# Altium PCB PCB.PcbDoc (part 1 of 3)
Units mm, origin at the board's own origin, x right, y up, seen from the top; angles counter-clockwise.
Board outline 140.5 x 50 mm, 2 copper layers (Top Layer, Bottom Layer), stack 1.69 mm thick; 217 components, 154 nets, 1179 pads, 592 vias.
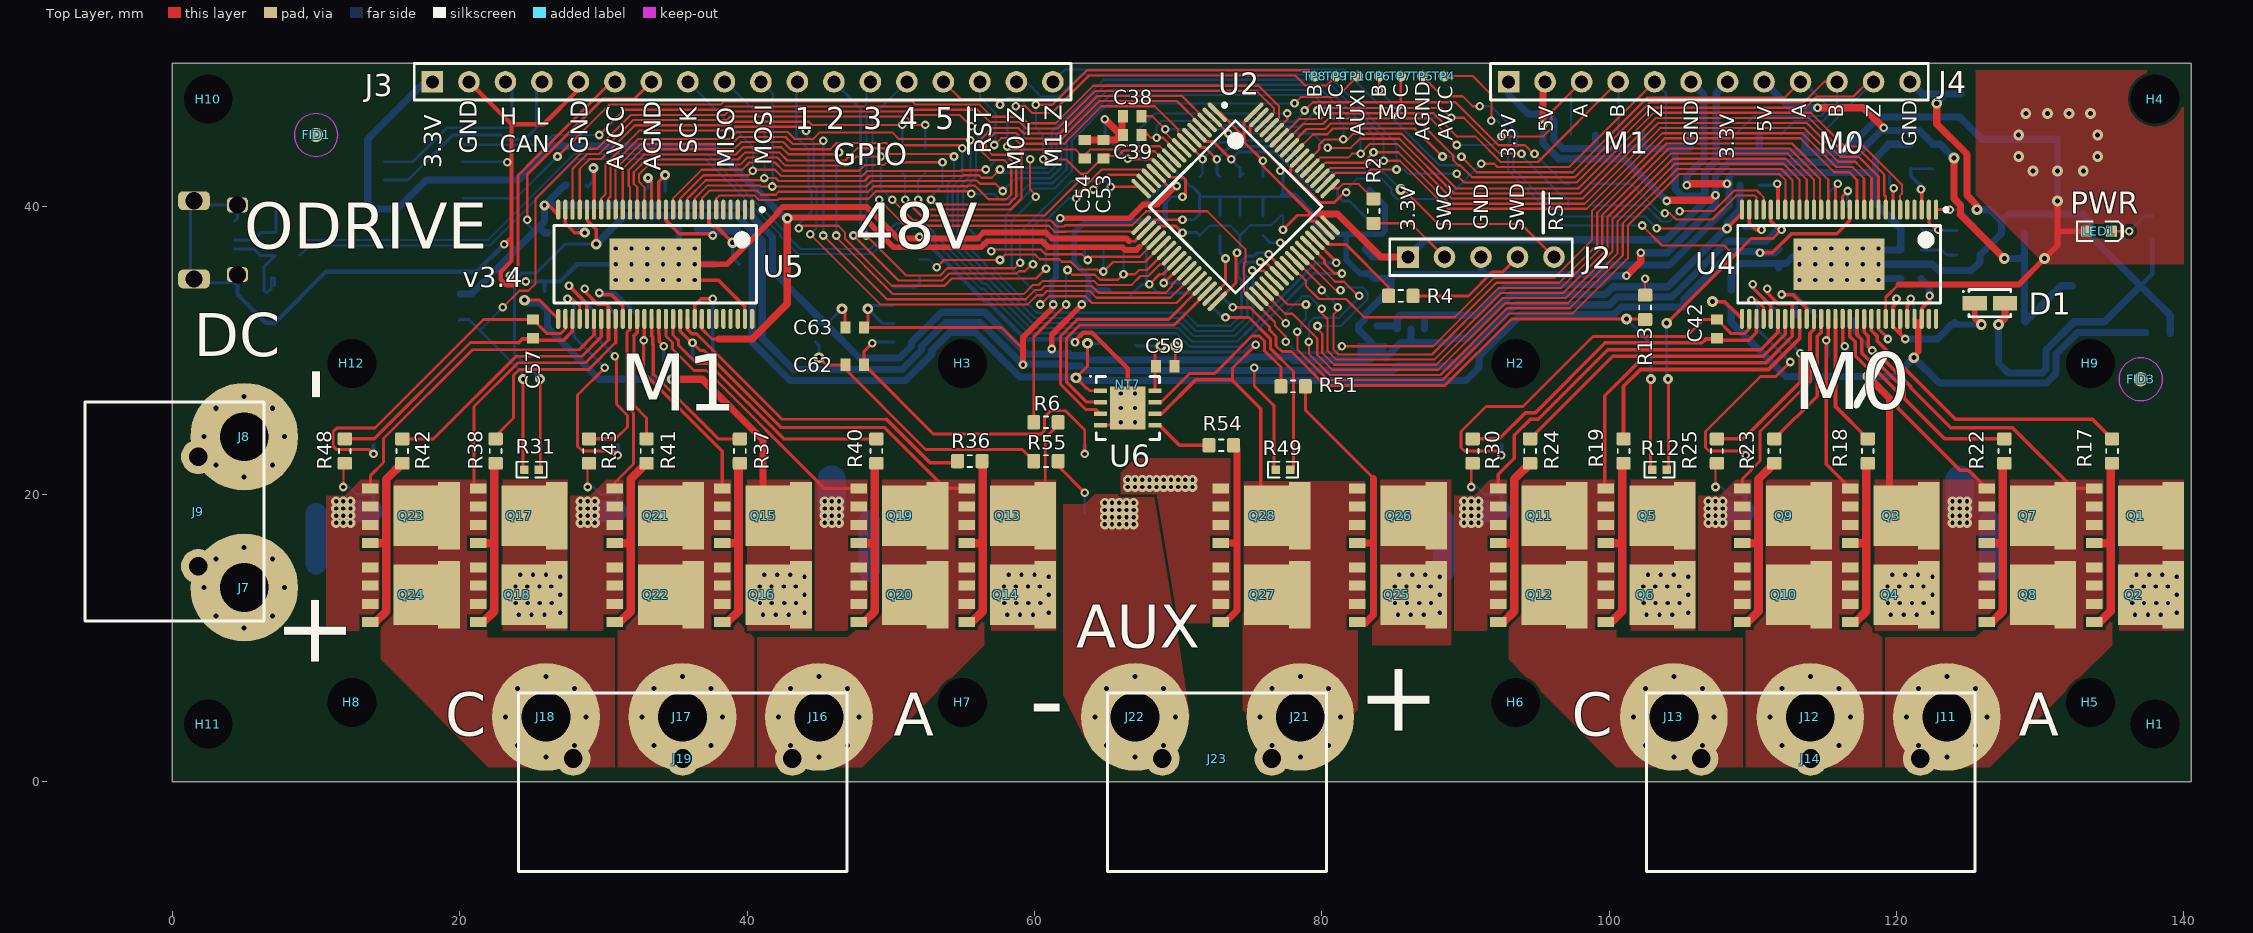
[diagram p0: Top Layer view]
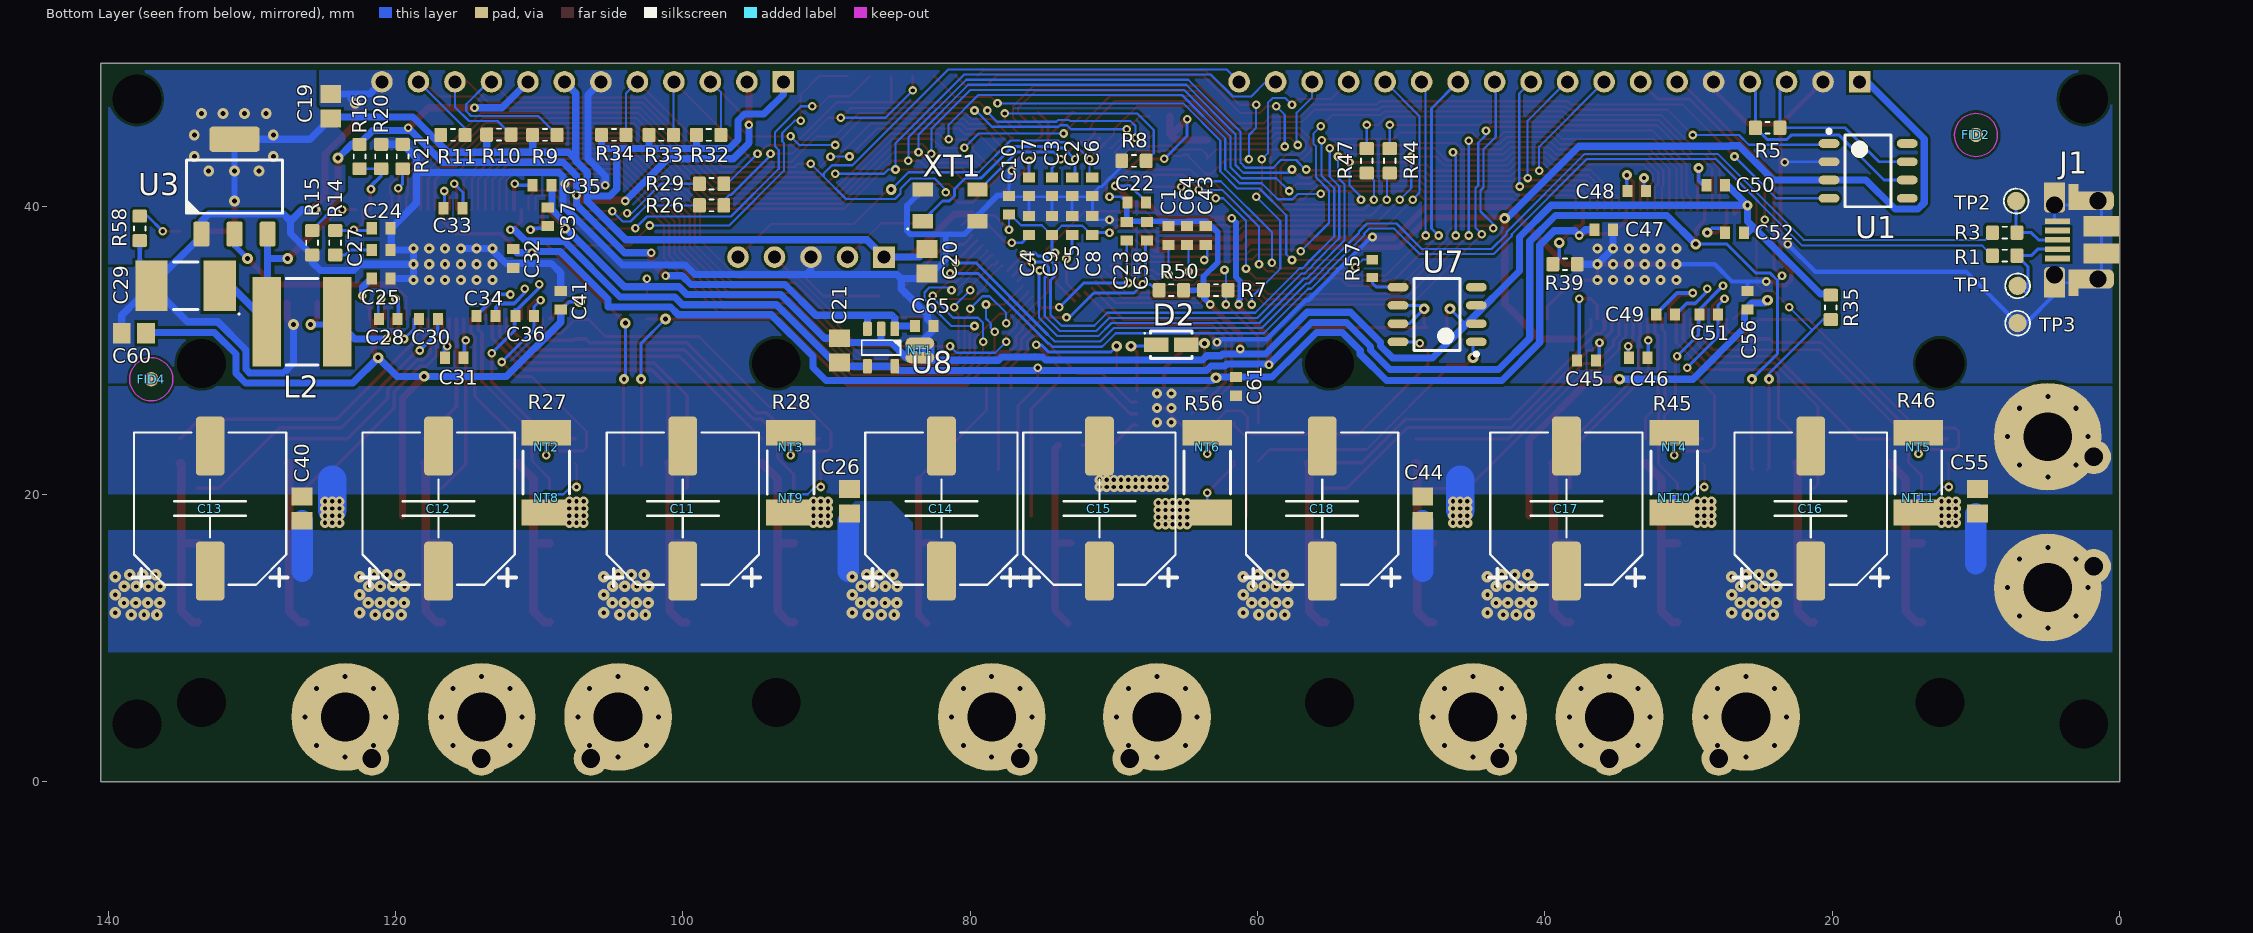
[diagram p1: Bottom Layer view, seen from below]
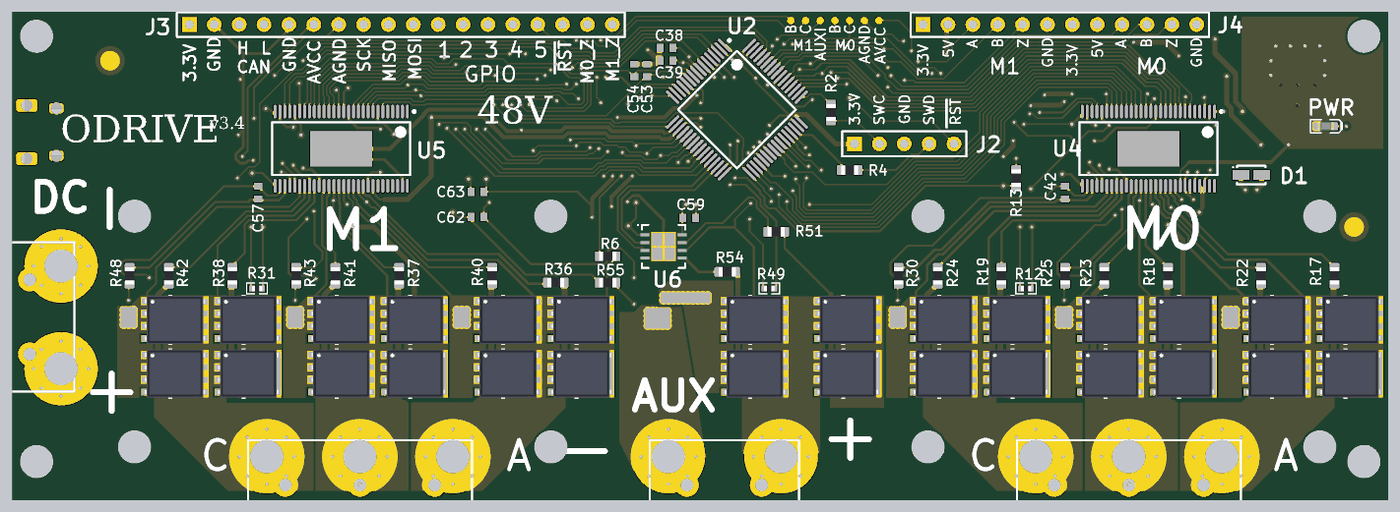
[diagram p4: 3D render of the assembled board from above, using the file's embedded part models]

## Layer stack, top to bottom
Top Solder: solder mask 0.0102, Solder Resist, Dk 3.5
Top Layer: signal copper 0.07
Dielectric1: core 1.55, FR-4, Dk 4.8
Bottom Layer: signal copper 0.07
Bottom Solder: solder mask 0.0102, Solder Resist, Dk 3.5

## Board outline
0,0 0,50 140.5,50 140.5,0

## Design rules (kind name [scope] priority, off if disabled: settings)
Clearance [All] p1: gap=0.203 except(0.185: SMDPad-SMDPad)
ComponentClearance [HasFootprint('NetTie_0.25mm')] p1: gap=-100 collisioncheckmode=3 verticalgap=2540 showdistances=FALSE
ComponentClearance ComponentClearance_1 [HasFootprint('1704936') or HasFootprint('1868076')] p2: gap=-100 collisioncheckmode=3 verticalgap=0.254 showdistances=FALSE
ComponentClearance ComponentClearance_2 [All] p3: gap=0.254 collisioncheckmode=3 verticalgap=0.254 showdistances=FALSE
FanoutControl Fanout_LCC [IsLCC] p1: bgadir=Out bgaviamode=Centered fanoutstyle=Auto fanoutdirection=Alternating viagrid=0.025 // Fanout_LCC (Default Rule)
FanoutControl Fanout_SOIC [IsSOIC] p2: bgadir=Out bgaviamode=Centered fanoutstyle=Auto fanoutdirection=Alternating viagrid=0.025 // Fanout_SOIC (Default Rule)
FanoutControl Fanout_Small [(CompPinCount < 5)] p3: bgadir=Out bgaviamode=Centered fanoutstyle=Auto fanoutdirection=OutThenIn viagrid=0.025 // Fanout_Small (Default Rule)
FanoutControl Fanout_Default [All] p4: bgadir=Out bgaviamode=Centered fanoutstyle=Auto fanoutdirection=Alternating viagrid=0.025 // Fanout_Default (Default Rule)
HoleSize [All] p1: absolutevalues=TRUE maxlimit=6.35 minlimit=0.3 maxpercent=80.000 minpercent=20.000
HoleToHoleClearance [All] p1: gap=0.45 allowstackedmicrovias=TRUE
MinimumAnnularRing [All] p1: minimumring=0.15
MinimumSolderMaskSliver [InPadClass('All Pads') And Not InComponent('J1')] p1: minsoldermaskwidth=0.18
PolygonConnect [All] p1: connectstyle=Direct reliefconductorwidth=0.254 reliefentries=4 polygonreliefangle="90 Angle" airgapwidth=0.254
RoutingVias [All] p1: holewidth=0.35 width=0.75 viastyle="Through Hole" minholewidth=0.3 minwidth=0.6 maxholewidth=1 maxwidth=1.7
SilkToSolderMaskClearance [IsPad] p1: minsilkscreentomaskgap=0.2 clearancetoexposedcopper=FALSE
SolderMaskExpansion [All] p1: expansion=0.102
Width [All] p1: maxlimit=5 minlimit=0.152 preferedwidth=0.203 toplayer_minwidth=0.152 bottomlayer_prefwidth=0.203 minimp=50.000000 maximp=50.000000 favimp=50.000000 checkconnectedcopper=TRUE
20 further rules are at their usual default settings.

## Classes and differential pairs
component class Top: C1 C2 C3 C4 C5 C6 C7 C8 C9 C10 C11 C12 C13 C14 C15 C16 C17 C18 C19 C20 C21 C22 C65 FID1 FID2 FID3 FID4 H1 H2 H3 H4 H5 H6 H7 H8 H9 H10 H11 H12 J1 J2 J3 J4 J7 J8 J9 LED1 NT1 R1 R2 R3 R4 R5 R6 R7 R8 R9 R10 R11 R32 R33 R34 R58 TP1 TP2 TP3 TP4 TP5 U1 U2 U3 U8 XT1
component class "Motor 1": C43 C44 C45 C46 C47 C48 C49 C50 C51 C52 C53 C54 C55 C56 C57 J16 J17 J18 J19 NT4 NT5 NT10 NT11 Q13 Q14 Q15 Q16 Q17 Q18 Q19 Q20 Q21 Q22 Q23 Q24 R31 R35 R36 R37 R38 R39 R40 R41 R42 R43 R44 R45 R46 R47 R48 TP8 TP9 U5
component class "Motor 0": C23 C24 C25 C26 C27 C28 C29 C30 C31 C32 C33 C34 C35 C36 C37 C38 C39 C40 C41 C42 C60 D1 J11 J12 J13 J14 L2 NT2 NT3 NT8 NT9 Q1 Q2 Q3 Q4 Q5 Q6 Q7 Q8 Q9 Q10 Q11 Q12 R12 R13 R14 R15 R16 R17 R18 R19 R20 R21 R22 R23 R24 R25 R26 R27 R28 R29 R30 TP6 TP7 U4
component class Aux: C58 C59 C61 C62 C63 C64 D2 J21 J22 J23 NT6 NT7 Q25 Q26 Q27 Q28 R49 R50 R51 R54 R55 R56 R57 TP10 U6 U7

## Components (designator, comment, footprint, x,y, rotation, side; value= is the part's Value field where it differs from the comment)
C1 "2.2µF" CAPC1608X09L 66.2,38 r270 bottom
C2 "10pF" CAPC1608X09L 72.9,41.4 r270 bottom
C3 "10pF" CAPC1608X09L 74.3,41.4 r270 bottom
C4 "2.2µF" CAPC1608X09L 75.9,38.7 r270 bottom
C5 "2.2µF" CAPC1608X09L 72.9,38.7 r270 bottom
C6 "0.1uF" CAPC1608X09L 71.5,41.4 r90 bottom
C7 "0.1uF" CAPC1608X09L 75.9,41.4 r270 bottom
C8 "0.1uF" CAPC1608X09L 71.5,38.7 r90 bottom
C9 "0.1uF" CAPC1608X09L 74.3,38.7 r90 bottom
C10 "0.1uF" CAPC1608X09L 77.3,40.1 r90 bottom
C11 "470uF" CAP_ELEC_SIZE_G 100,19 r180 bottom
C12 "470uF" CAP_ELEC_SIZE_G 117,19 r180 bottom
C13 "470uF" CAP_ELEC_SIZE_G 132.9,19 r180 bottom
C14 "470uF" CAP_ELEC_SIZE_G 82,19 r180 bottom
C15 "470uF" CAP_ELEC_SIZE_G 71,19 r180 bottom
C16 "470uF" CAP_ELEC_SIZE_G 21.5,19 r180 bottom
C17 "470uF" CAP_ELEC_SIZE_G 38.5,19 r180 bottom
C18 "470uF" CAP_ELEC_SIZE_G 55.5,19 r180 bottom
C19 "4.7uF" CAPC2012X09N 124.5,47 r270 bottom
C20 "4.7uF" CAPC2012X09N 83,36.2 r90 bottom
C21 "4.7uF" CAPC2012X09N 89.1,30 r270 bottom
C22 "0.1uF" CAPC1608X09L 68.4,40.3 r0 bottom
C23 "2.2µF" CAPC1608X09L 69.1,38.3 r270 bottom
C24 "82pF" CAPC1608X09L 121,38.5 r180 bottom
C25 "0.1uF" CAPC1608X09L 121,35 r180 bottom
C26 "4.7uF" CAPC2012X09N 88.4,19.5 r270 bottom
C27 "270pF" CAPC1608X09L 121,37 r180 bottom
C28 "0.1uF" CAPC1608X09L 120.5,32.2 r0 bottom
C29 "68uF" CAPCP6032X28N 134.6,34.5 r0 bottom
C30 "0.1uF" CAPC1608X09L 117.7,32.2 r0 bottom
C31 "0.1uF" CAPC1608X09L 115.9,29.5 r0 bottom
C32 "2.2µF" CAPC1608X09L 111.8,36.4 r90 bottom
C33 "0.022µF" CAPC1608X09L 116,39.9 r180 bottom
C34 "0.1uF" CAPC1608X09L 113.7,32.4 r0 bottom
C35 "2.2µF" CAPC1608X09L 109.8,41.5 r0 bottom
C36 "2200pF" CAPC1608X09L 111,32.4 r180 bottom
C37 "2.2µF" CAPC1608X09L 109.4,39.3 r270 bottom
C38 "2200pF" CAPC1608X09L 66.8,46.3 r180 top
C39 "2200pF" CAPC1608X09L 66.8,45 r180 top
C40 "4.7uF" CAPC2012X09N 126.5,19 r270 bottom
C41 "0.1uF" CAPC1608X09L 108.5,33.5 r90 bottom
C42 "2200pF" CAPC1608X09L 107.5,31.5 r90 top
C43 "2.2µF" CAPC1608X09L 63.6,38 r270 bottom
C44 "4.7uF" CAPC2012X09N 48.5,19 r270 bottom
C45 "0.1uF" CAPC1608X09L 37.1,29.3 r0 bottom
C46 "0.1uF" CAPC1608X09L 33.5,29.5 r0 bottom
C47 "2.2µF" CAPC1608X09L 35.9,38.4 r0 bottom
C48 "0.022µF" CAPC1608X09L 33.6,41.1 r180 bottom
C49 "0.1uF" CAPC1608X09L 31.6,32.5 r0 bottom
C50 "2.2µF" CAPC1608X09L 28.1,41.5 r0 bottom
C51 "2200pF" CAPC1608X09L 28.6,32.5 r180 bottom
C52 "2.2µF" CAPC1608X09L 26.8,38.2 r0 bottom
C53 "2200pF" CAPC1608X09L 64.8,44 r90 top
C54 "2200pF" CAPC1608X09L 63.5,44 r90 top
C55 "4.7uF" CAPC2012X09N 9.9,19.5 r270 bottom
C56 "0.1uF" CAPC1608X09L 25.9,33.5 r90 bottom
C57 "2200pF" CAPC1608X09L 25.1,31.5 r90 top
C58 "2.2µF" CAPC1608X09L 67.7,38.3 r270 bottom
C59 "0.1uF" CAPC1608X09L 69.1,28.9 r0 top
C60 "4.7uF" CAPC2012X09N 138.2,31.2 r180 bottom
C61 "2.2µF" CAPC1608X09L 61.5,27.5 r90 bottom
C62 "2200pF" CAPC1608X09L 47.5,29 r0 top
C63 "0.1uF" CAPC1608X09L 47.5,31.6 r180 top
C64 "2200pF" CAPC1608X09L 64.9,38 r90 bottom
C65 "2.2µF" CAPC1608X09L 83.2,31.7 r0 bottom
D1 "" DIOM2717X10N 126.5,33.3 r0 top
D2 "" DIOM2717X10N 66,30.4 r180 bottom
FID1 "FIDUCIAL" FIDUCIAL 10,45 r0 top
FID2 "FIDUCIAL" FIDUCIAL 10,45 r90 bottom
FID3 "FIDUCIAL" FIDUCIAL 137,28 r90 top
FID4 "FIDUCIAL" FIDUCIAL 137,28 r90 bottom
H1 "" "M3 Hole" 138,4 r0 top
H2 "" "M3 Hole" 93.5,29.1 r0 top
H3 "" "M3 Hole" 55,29.1 r0 top
H4 "" "M3 Hole" 138,47.5 r0 top
H5 "" "M3 Hole" 133.5,5.5 r0 top
H6 "" "M3 Hole" 93.5,5.5 r0 top
H7 "" "M3 Hole" 55,5.5 r0 top
H8 "" "M3 Hole" 12.5,5.5 r0 top
H9 "" "M3 Hole" 133.5,29.1 r0 top
H10 "" "M3 Hole" 2.5,47.5 r0 top
H11 "" "M3 Hole" 2.5,4 r0 top
H12 "" "M3 Hole" 12.5,29.1 r0 top
J1 "" USB_0103594-0001LF 1.5,37.7 r90 bottom
J2 "" HDR1X5 86,36.5 r0 top
J3 "Leftheader" HDR1X18 18.1,48.7 r0 top
J4 "Rightheader" HDR1X12 93,48.7 r0 top
J7 "" "M3 Spade Hole" 5,13.5 r0 top
J8 "" "M3 Spade Hole" 5,24 r0 top
J9 "1868076" 1868076 1.8,22.6 r270 top
J11 "" "M3 Spade Hole" 123.5,4.5 r0 top
J12 "" "M3 Spade Hole" 114,4.5 r0 top
J13 "" "M3 Spade Hole" 104.5,4.5 r0 top
J14 "1704936" 1704936 106.4,1.6 r0 top
J16 "" "M3 Spade Hole" 45,4.5 r0 top
J17 "" "M3 Spade Hole" 35.5,4.5 r0 top
J18 "" "M3 Spade Hole" 26,4.5 r0 top
J19 "1704936" 1704936 27.9,1.6 r0 top
J21 "" "M3 Spade Hole" 78.5,4.5 r0 top
J22 "" "M3 Spade Hole" 67,4.5 r0 top
J23 "1868076" 1868076 68.9,1.6 r0 top
L2 "22uH" INDC6060X28N 126.5,32 r0 bottom
LED1 "Green" LED-0603-GREEN 134.1,38.3 r0 top
NT1 "" NetTie_2mm 83.5,30.5 r270 bottom net-tie
NT2 "0.25mm" NetTie_0.25mm 109.5,23 r90 bottom net-tie
NT3 "0.25mm" NetTie_0.25mm 92.5,23 r90 bottom net-tie
NT4 "0.25mm" NetTie_0.25mm 31,23 r90 bottom net-tie
NT5 "0.25mm" NetTie_0.25mm 14,23 r90 bottom net-tie
NT6 "0.25mm" NetTie_0.25mm 63.5,23 r90 bottom net-tie
NT7 "0.25mm" NetTie_0.25mm 66.5,27.9 r270 top net-tie
NT8 "0.25mm" NetTie_0.25mm 109.5,20 r270 bottom net-tie
NT9 "0.25mm" NetTie_0.25mm 92.5,20 r270 bottom net-tie
NT10 "0.25mm" NetTie_0.25mm 31,20 r270 bottom net-tie
NT11 "0.25mm" NetTie_0.25mm 14,20 r270 bottom net-tie
Q1 "" SO8FL 136.5,18.5 r270 top
Q2 "FILL_FOOTPRINT" SO8FL_FILL 136.5,13 r270 top
Q3 "" SO8FL 119.5,18.5 r270 top
Q4 "FILL_FOOTPRINT" SO8FL_FILL 119.5,13 r270 top
Q5 "" SO8FL 102.5,18.5 r270 top
Q6 "FILL_FOOTPRINT" SO8FL_FILL 102.5,13 r270 top
Q7 "" SO8FL 129,18.5 r270 top
Q8 "" SO8FL 129,13 r270 top
Q9 "" SO8FL 112,18.5 r270 top
Q10 "" SO8FL 112,13 r270 top
Q11 "" SO8FL 95,18.5 r270 top
Q12 "" SO8FL 95,13 r270 top
Q13 "" SO8FL 58,18.5 r270 top
Q14 "FILL_FOOTPRINT" SO8FL_FILL 58,13 r270 top
Q15 "" SO8FL 41,18.5 r270 top
Q16 "FILL_FOOTPRINT" SO8FL_FILL 41,13 r270 top
Q17 "" SO8FL 24,18.5 r270 top
Q18 "FILL_FOOTPRINT" SO8FL_FILL 24,13 r270 top
Q19 "" SO8FL 50.5,18.5 r270 top
Q20 "" SO8FL 50.5,13 r270 top
Q21 "" SO8FL 33.5,18.5 r270 top
Q22 "" SO8FL 33.5,13 r270 top
Q23 "" SO8FL 16.5,18.5 r270 top
Q24 "" SO8FL 16.5,13 r270 top
Q25 "FILL_FOOTPRINT" SO8FL_FILL 85.2,13 r270 top
Q26 "" SO8FL 85.2,18.5 r270 top
Q27 "" SO8FL 75.7,13 r270 top
Q28 "" SO8FL 75.7,18.5 r270 top
R1 "22R" RESC1608X55N 8,36.6 r180 bottom
R2 "22R" RESC1608X55N 83.6,39.7 r90 top
R3 "22R" RESC1608X55N 8,38.2 r180 bottom
R4 "22R" RESC1608X55N 85.5,33.8 r180 top
R5 "120R" RESC1608X55N 24.5,45.5 r180 bottom
R6 "10K" RESC1608X55N 60.8,25 r0 top
R7 "1k" RESC1608X55N 62.9,34.2 r180 bottom
R8 "47K" RESC1608X55N 68.6,43.2 r180 bottom
R9 "3.3k" RESC1608X55N 109.6,45 r0 bottom
R10 "3.3k" RESC1608X55N 112.8,45.022 r0 bottom
R11 "3.3k" RESC1608X55N 116,45 r0 bottom
R12 "10k" RESC1005X40N 103.5,21.7 r0 top
R13 "3.3k" RESC1608X55N 102.5,33 r90 top
R14 "47K" RESC1608X55N 124.2,37.5 r270 bottom
R15 "220k" RESC1608X55N 125.8,37.5 r270 bottom
R16 "18k" RESC1608X55N 122.5,43.5 r270 bottom
R17 "2.2R" RESC1608X55N 135,23 r90 top
R18 "2.2R" RESC1608X55N 118,23 r90 top
R19 "2.2R" RESC1608X55N 101,23 r90 top
R20 "3.3k" RESC1608X55N 121,43.5 r90 bottom
R21 "18k" RESC1608X55N 119.5,43.5 r90 bottom
R22 "2.2R" RESC1608X55N 127.5,23 r90 top
R23 "2.2R" RESC1608X55N 111.5,23 r90 top
R24 "2.2R" RESC1608X55N 94.5,23 r90 top
R25 "120R" RESC1608X55N 107.5,23 r90 top
R26 "22R" RESC1608X55N 98,40.1 r180 bottom
R27 "500uOhm" RESC6432X09N 109.5,21.5 r270 bottom
R28 "500uOhm" RESC6432X09N 92.5,21.5 r270 bottom
R29 "22R" RESC1608X55N 98,41.6 r180 bottom
R30 "120R" RESC1608X55N 90.5,23 r90 top
R31 "10k" RESC1005X40N 25,21.7 r0 top
R32 "3.3k" RESC1608X55N 98.2,45 r180 bottom
R33 "3.3k" RESC1608X55N 101.5,45 r180 bottom
R34 "3.3k" RESC1608X55N 104.8,45 r180 bottom
R35 "3.3k" RESC1608X55N 20.1,33 r90 bottom
R36 "2.2R" RESC1608X55N 55.5,22.3 r0 top
R37 "2.2R" RESC1608X55N 39.5,23 r270 top
R38 "2.2R" RESC1608X55N 22.5,23 r270 top
R39 "18k" RESC1608X55N 38.6,36 r180 bottom
R40 "2.2R" RESC1608X55N 49,23 r270 top
R41 "2.2R" RESC1608X55N 33,23 r270 top
R42 "2.2R" RESC1608X55N 16,23 r270 top
R43 "120R" RESC1608X55N 29,23 r90 top
R44 "22R" RESC1608X55N 50.8,43.2 r270 bottom
R45 "500uOhm" RESC6432X09N 31,21.5 r270 bottom
R46 "500uOhm" RESC6432X09N 14,21.5 r270 bottom
R47 "22R" RESC1608X55N 52.4,43.2 r270 bottom
R48 "120R" RESC1608X55N 12,23 r90 top
R49 "10k" RESC1005X40N 77.3,21.7 r180 top
R50 "3.3k" RESC1608X55N 66,34.2 r180 bottom
R51 "2.2R" RESC1608X55N 78,27.5 r0 top
R54 "2.2R" RESC1608X55N 73,23.4 r0 top
R55 "120R" RESC1608X55N 60.8,22.3 r0 top
R56 "500uOhm" RESC6432X09N 63.5,21.5 r90 bottom
R57 "120R" RESC1608X06L 52,35.7 r90 bottom
R58 "1k" RESC1608X55N 137.8,38.5 r270 bottom
TP1 "TESTPOINT" TP-R60 7.1,34.5 r180 bottom
TP2 "TESTPOINT" TP-R60 7.2,40.4 r90 bottom
TP3 "TESTPOINT" TP-R60 7.1,31.9 r90 bottom
TP4 "TESTPOINT" TP-R30 88.5,49.1 r90 top
TP5 "TESTPOINT" TP-R30 87,49.1 r90 top
TP6 "TESTPOINT" TP-R30 84,49.1 r90 top
TP7 "TESTPOINT" TP-R30 85.5,49.1 r90 top
TP8 "TESTPOINT" TP-R30 79.5,49.1 r90 top
TP9 "TESTPOINT" TP-R30 81,49.1 r90 top
TP10 "TESTPOINT" TP-R30 82.5,49.1 r90 top
U1 "SN65HVD232D" SOIC127P600X175-8N 17.5,42.5 r180 bottom
U2 "" STM-LQFP64_N 74,40 r315 top
U3 "3.3V" SOT223 131.2,41.4 r90 bottom
U4 "" TSSOP50P810X120_HS-57N 116,36 r270 top
U5 "" TSSOP50P810X120_HS-57N 33.6,36 r270 top
U6 "" SON80P400X80_HS-9N 66.5,26 r0 top
U7 "" SOIC127P600X175-8N 47.5,32.5 r0 bottom
U8 "3.3V" SOT23-5 86.2,30.2 r270 bottom
XT1 "8 MHz" DFN220P320X110-4N 81.4,40.1 r180 bottom

## Footprints (in the part's own frame and the unit in brackets; to place one, negate y for a bottom-side part, rotate by r counter-clockwise, add the part's x,y. Pads: shape width x height; smd on the part's side, far side on the other; paste and mask are expansions set on the pad)
1704936 [mm] "CONN TERM BLOCK 3POS 7.62MM"
  round 2.4 hole 1.3: 1(0,0) 2(7.62,0) 3(15.24,0)
  silkscreen extent -3.81,-7.87 19.05,4.57
1868076 [mm] "CONN TERM BLOCK 2POS 7.62MM"
  round 2.4 hole 1.3: 1(0,0) 2(7.62,0)
  silkscreen extent -3.81,-7.87 11.43,4.57
CAP_ELEC_SIZE_G [mm] "Capacitor, polarized, aluminum can; 10.0x10.2mm DxH"
  round 0.635 on Mech15: 0(0,0)
  rrect25% 2x4.1 smd: 1(0,-4.35) 2(0,4.35)
  silkscreen extent -5.4,-5.4 5.4,5.3, body extent -5.25,-6 5.25,6, height 10.5
CAPC1608X09L [mm] "Chip Capacitor, 2-Leads, Body 1.60x0.80mm, IPC High Density"
  rect 0.7x0.85 smd: 1(-0.65,0) 2(0.65,0)
  body extent -0.85,-0.45 0.85,0.45, height 0.9
CAPC2012X09N [mm] "Chip Capacitor, 2-Leads, Body 2.00x1.25mm, IPC Medium Density"
  rect 1.25x1.45 smd: 1(-0.85,0) 2(0.85,0)
  body extent -1.08,-0.7 1.07,0.7, height 0.95
CAPCP6032X28N [mm] "Chip Capacitor, 2-Leads, Body 6.00x3.20mm, IPC Medium Density"
  rect 2.25x3.5 smd: 1(-2.375,0) 2(2.375,0)
  silkscreen extent -3.76,-1.65 0.85,2.01, body extent -3.15,-1.75 3.15,1.75, height 2.8
DFN220P320X110-4N [mm] "DFN, 4-Leads, Body 5.00x3.20mm, Pitch 2.20mm, IPC Medium Density"
  rect 1.4x1 smd: 1(-1.9,-1.1) 3(1.9,1.1) G(-1.9,1.1) G(1.9,-1.1)
  silkscreen extent -3,-1.7 -2.9,-1.6, body extent -2.55,-1.65 2.55,1.65, height 1.1
DIOM2717X10N [mm] "Molded Diode, 2-Leads, Body 2.70x1.65mm, IPC Medium Density"
  rect 1.7x1 smd: A(1.05,0) K(-1.05,0)
  silkscreen extent -1.9,-0.95 1.45,0.95, body extent -1.45,-0.9 1.45,0.9, height 1
FIDUCIAL [mm] "1mm fiducial with 3mm keepout"
  round 1 smd paste-1 mask+0.5: 0(0,0)
  Keep-Out Layer region: 0,-1.5 -0.574,-1.386 -1.061,-1.061 -1.386,-0.574 -1.5,0 -1.5,0 -1.386,0.574 -1.061,1.061 -0.574,1.386 0,1.5 0,1.5 0.574,1.386 1.061,1.061 1.386,0.574 1.5,0 1.5,0 1.386,-0.574 1.061,-1.061 0.574,-1.386 0,-1.5
HDR1X5 [mm] "Connector; Header; 5 Position"
  rect 1.5x1.5 hole 0.9: 1(0,0)
  round 1.5 hole 0.9: 2(2.54,0) 3(5.08,0) 4(7.62,0) 5(10.16,0)
  silkscreen extent -1.27,-1.27 11.43,1.27
HDR1X12 [mm] "Connector; Header; 12 Position"
  rect 1.5x1.5 hole 0.9: 1(0,0)
  round 1.5 hole 0.9: 2(2.54,0) 3(5.08,0) 4(7.62,0) 5(10.16,0) 6(12.7,0) 7(15.24,0) 8(17.78,0) 9(20.32,0) 10(22.86,0) 11(25.4,0) 12(27.94,0)
  silkscreen extent -1.27,-1.27 29.21,1.27
HDR1X18 [mm] "Connector; Header; 18 Position"
  rect 1.5x1.5 hole 0.9: 1(0,0)
  round 1.5 hole 0.9: 2(2.54,0) 3(5.08,0) 4(7.62,0) 5(10.16,0) 6(12.7,0) 7(15.24,0) 8(17.78,0) 9(20.32,0) 10(22.86,0) 11(25.4,0) 12(27.94,0) 13(30.48,0) 14(33.02,0) 15(35.56,0) 16(38.1,0) 17(40.64,0) 18(43.18,0)
  silkscreen extent -1.27,-1.27 44.45,1.27
INDC6060X28N [mm] "Chip Inductor, 2-Leads, Body 6.00x6.00mm, IPC Medium Density"
  rect 1.98x6.22 smd: 1(-2.46,0) 2(2.46,0)
  silkscreen extent -1.1,-3.01 1.1,3.01, body extent -3.1,-3.1 3.1,3.1, height 2.8
LED-0603-GREEN [mm]
  round 0.254 on Mech15: 0(0,0)
  rrect25% 0.8x0.8 smd: A(-0.85,0) K(0.85,0)
  Top Layer pour cut-out: -0.5,0.5 0.5,0.5 0.5,-0.5 -0.5,-0.5
  silkscreen extent -1.55,-0.67 1.68,0.67, body extent -0.8,-0.4 0.8,0.4, height 0.75
"M3 Hole" [mm] "M3 Hole with no copper"
  round 3 hole 3.4 unplated: 1(0,0)
"M3 Spade Hole" [mm]
  round 7.5 hole 3.4: 1(0,0)
NetTie_0.25mm [mm] "Net tie, 0.25mm"
  round 0.25 smd paste-2: 1(0,0) 2(0.5,0)
  Top Layer region: 0,0.125 0.5,0.125 0.5,-0.125 0,-0.125
NetTie_2mm [mm] "Net tie, 2mm round"
  oval 0.8x2 smd paste-2: 1(0,0) 2(1,0)
  Top Layer region: 0,1 1,1 1,-1 0,-1
RESC1005X40N [mm] "Chip Resistor, Body 1.0x0.5mm, EIA 0402, IPC Medium Density"
  round 0.2 on Mech15: 0(0,0)
  rrect20% 0.6x0.6 smd: 1(-0.5,0) 2(0.5,0)
  Top Layer pour cut-out: -0.325,0.375 -0.2,0.5 0.2,0.5 0.325,0.375 0.325,-0.375 0.2,-0.5 -0.2,-0.5 -0.325,-0.375
  silkscreen extent -1.05,-0.55 1.05,0.55, body extent -0.52,-0.27 0.53,0.28, height 0.4
RESC1608X06L [mm] "Chip Resistor, 2-Leads, Body 1.60x0.80mm, IPC High Density"
  rect 0.65x0.8 smd: 1(-0.625,0) 2(0.625,0)
  body extent -0.85,-0.45 0.85,0.45, height 0.6
RESC1608X55N [mm] "Chip Resistor, Body 1.6x0.8mm, EIA 0603, IPC Medium Density"
  round 0.254 on Mech15: 0(0,0)
  rrect25% 0.9x1 smd: 1(-0.85,0) 2(0.85,0)
  Top Layer pour cut-out: -0.6,0.5 -0.4,0.7 0.4,0.7 0.6,0.5 0.6,-0.5 0.4,-0.7 -0.4,-0.7 -0.6,-0.5
  silkscreen extent -0.15,-0.41 0.15,0.41, body extent -0.87,-0.47 0.88,0.48, height 0.54
RESC6432X09N [mm] "Chip Resistor, 2-Leads, Body 6.40x3.20mm, IPC Medium Density"
  rect 1.8x3.45 smd: 1(-2.775,0) 2(2.775,0)
  silkscreen extent -1.5,-1.62 1.5,1.62, body extent -3.32,-1.73 3.32,1.73, height 0.9
SO8FL [mm] "DFN5 5x6, 1.27P  (SO-8FL)  CASE 488AA"
  rect 0.9x0.6 on Top Paste: 7(0,2) 7(0,1.15) 7(0,0.3) 7(0,-0.55) 9(-1.15,2) 9(-1.15,1.15) 9(-1.15,0.3) 9(-1.15,-0.55) 10(1.15,2) 10(1.15,1.15) 10(1.15,0.3) 10(1.15,-0.55)
  rect 0.6x0.9 on Top Paste: 11(-1.875,3) 11(-0.65,3) 11(0.65,3) 11(1.875,3)
  rect 4.7x1.5 smd paste-10 mask+0.075: D(0,2.75)
  rect 4.2x2.2 smd paste-10 mask+0.075: D(0,1.35) D(0,0)
  rect 0.7x1.15 smd paste-0.05 mask+0.075: G(1.905,-2.725) S(-1.905,-2.725) S(-0.635,-2.725) S(0.635,-2.725)
  body extent -2.57,-2.95 2.58,3.2, height 1.13
SO8FL_FILL [mm] "DFN5 5x6, 1.27P  (SO-8FL)  CASE 488AA. Full solder paste"
  rect 4.7x1.5 smd paste-10 mask+0.075: D(0,2.75)
  rect 4.2x2.2 smd paste-10 mask+0.075: D(0,1.35) D(0,0)
  rect 0.7x1.15 smd paste-0.05 mask+0.075: G(1.905,-2.725) S(-1.905,-2.725) S(-0.635,-2.725) S(0.635,-2.725)
  body extent -2.57,-2.95 2.58,3.2, height 1.13
SOIC127P600X175-8N [mm] "SOIC, 8-Leads, Body 4.90x3.90mm, Pitch 1.27mm, IPC Medium Density"
  oval 1.45x0.6 smd: 1(-2.725,1.905) 2(-2.725,0.635) 3(-2.725,-0.635) 4(-2.725,-1.905) 5(2.725,-1.905) 6(2.725,-0.635) 7(2.725,0.635) 8(2.725,1.905)
  silkscreen extent -2.85,-2.5 1.6,2.88, body extent -2,-2.5 2,2.5, height 1.75
SON80P400X80_HS-9N [mm] "SON, 8-Leads, Body 4.00x4.00mm, Pitch 0.80mm, Thermal Pad 3.00x2.49mm, IPC Medium Density"
  rect 0.9x0.3 smd mask+0: 1(-1.895,1.2) 2(-1.895,0.4) 3(-1.895,-0.4) 4(-1.895,-1.2) 5(1.895,-1.2) 6(1.895,-0.4) 7(1.895,0.4) 8(1.895,1.2)
  rect 2.49x3 smd paste-1.245 mask+0: 9(0,0)
  silkscreen extent -2.65,-2.2 2.2,2.25, body extent -2.05,-2.05 2.05,2.05, height 0.8
SOT23-5 [mm]
  round 0.5 on Mech15: 0(0,0)
  rrect25% 1x0.6 smd: 1(-1.3,0.95) 2(-1.3,0) 3(-1.3,-0.95) 4(1.3,-0.95) 5(1.3,0.95)
  silkscreen extent -0.51,-1.35 0.51,1.35, body extent -1.4,-1.45 1.4,1.45, height 1.44
SOT223 [mm] "SOT223 /SC-73"
  round 1 on Mech15: 0(0,0)
  rrect25% 1.75x1.1 smd: 1(-3.3,2.3) 2(-3.3,0) 3(-3.3,-2.3)
  rrect25% 1.75x3.5 smd: 4(3.3,0)
  silkscreen extent -1.85,-3.35 1.85,3.35, body extent -3.65,-3.35 3.65,3.35, height 1.8
STM-LQFP64_N [mm] "Thin QFP, 64-Leads, Body 10x10mm, Pitch 0.5mm, IPC Medium Density"
  oval 1.8x0.3 smd: 1(-5.55,3.75) 2(-5.55,3.25) 3(-5.55,2.75) 4(-5.55,2.25) 5(-5.55,1.75) 6(-5.55,1.25) 7(-5.55,0.75) 8(-5.55,0.25) 9(-5.55,-0.25) 10(-5.55,-0.75) 11(-5.55,-1.25) 12(-5.55,-1.75) 13(-5.55,-2.25) 14(-5.55,-2.75) 15(-5.55,-3.25) 16(-5.55,-3.75) 33(5.55,-3.75) 34(5.55,-3.25) 35(5.55,-2.75) 36(5.55,-2.25) 37(5.55,-1.75) 38(5.55,-1.25) 39(5.55,-0.75) 40(5.55,-0.25) 41(5.55,0.25) 42(5.55,0.75) 43(5.55,1.25) 44(5.55,1.75) 45(5.55,2.25) 46(5.55,2.75) 47(5.55,3.25) 48(5.55,3.75)
  oval 0.3x1.8 smd: 17(-3.75,-5.55) 18(-3.25,-5.55) 19(-2.75,-5.55) 20(-2.25,-5.55) 21(-1.75,-5.55) 22(-1.25,-5.55) 23(-0.75,-5.55) 24(-0.25,-5.55) 25(0.25,-5.55) 26(0.75,-5.55) 27(1.25,-5.55) 28(1.75,-5.55) 29(2.25,-5.55) 30(2.75,-5.55) 31(3.25,-5.55) 32(3.75,-5.55) 49(3.75,5.55) 50(3.25,5.55) 51(2.75,5.55) 52(2.25,5.55) 53(1.75,5.55) 54(1.25,5.55) 55(0.75,5.55) 56(0.25,5.55) 57(-0.25,5.55) 58(-0.75,5.55) 59(-1.25,5.55) 60(-1.75,5.55) 61(-2.25,5.55) 62(-2.75,5.55) 63(-3.25,5.55) 64(-3.75,5.55)
  silkscreen extent -5.67,-4.25 4.25,4.57, body extent -5,-5 5,5, height 1.6
TP-R30 [mil]
  round 30 smd paste-30 mask+3: 1(0,0)
  body extent -18,-18 18,18, height 10
TP-R60 [mm]
  round 1.27 smd paste-1.27: 1(0,0)
  silkscreen extent -0.86,-0.86 0.86,0.86, body extent -0.76,-0.76 0.76,0.76, height 0.25
TSSOP50P810X120_HS-57N [mm] "TSSOP, 56-Leads, Body 14.00x6.10mm, Pitch 0.50mm, Thermal Pad 6.35x3.61mm, IPC Medium Density"
  oval 1.4x0.3 smd: 1(-3.8,6.75) 2(-3.8,6.25) 3(-3.8,5.75) 4(-3.8,5.25) 5(-3.8,4.75) 6(-3.8,4.25) 7(-3.8,3.75) 8(-3.8,3.25) 9(-3.8,2.75) 10(-3.8,2.25) 11(-3.8,1.75) 12(-3.8,1.25) 13(-3.8,0.75) 14(-3.8,0.25) 15(-3.8,-0.25) 16(-3.8,-0.75) 17(-3.8,-1.25) 18(-3.8,-1.75) 19(-3.8,-2.25) 20(-3.8,-2.75) 21(-3.8,-3.25) 22(-3.8,-3.75) 23(-3.8,-4.25) 24(-3.8,-4.75) 25(-3.8,-5.25) 26(-3.8,-5.75) 27(-3.8,-6.25) 28(-3.8,-6.75) 29(3.8,-6.75) 30(3.8,-6.25) 31(3.8,-5.75) 32(3.8,-5.25) 33(3.8,-4.75) 34(3.8,-4.25) 35(3.8,-3.75) 36(3.8,-3.25) 37(3.8,-2.75) 38(3.8,-2.25) 39(3.8,-1.75) 40(3.8,-1.25) 41(3.8,-0.75) 42(3.8,-0.25) 43(3.8,0.25) 44(3.8,0.75) 45(3.8,1.25) 46(3.8,1.75) 47(3.8,2.25) 48(3.8,2.75) 49(3.8,3.25) 50(3.8,3.75) 51(3.8,4.25) 52(3.8,4.75) 53(3.8,5.25) 54(3.8,5.75) 55(3.8,6.25) 56(3.8,6.75)
  rect 3.61x6.35 smd: 57(0,0)
  silkscreen extent -3.92,-7.05 2.7,7.58, body extent -3.1,-7.05 3.1,7.05, height 1.2
USB_0103594-0001LF [mm] "Micro USB B connector"
  rect 0.4x1.75 smd: 1(-1.3,2.825) 2(-0.65,2.825) 3(0,2.825) 4(0.65,2.825) 5(1.3,2.825)
  rect 1.6x1.46 smd: SH(-3.2,3.025) SH(3.2,3.025)
  rect 1.825x0.7 smd: SH(-2.987,1.7) SH(2.987,1.7)
  rrect50% 1.3x2.2 hole 1.2: SH(-2.725,0) SH(2.725,0)
  rrect50% 1.3x2.2 smd: SH(-2.725,0.875) SH(2.725,0.875)
  rrect50% 1.05x1.46 hole 1.2: SH(-2.425,3.025) SH(2.425,3.025)
  rect 1.425x2.5 smd: SH(-0.95,-0.25) SH(0.95,-0.25)

## Part data
C1 C4 C5 C23 C32 C35 C37 C43 C47 C50 C52 C58 C61 C65: library part GRM188R61C225KE15D, "CAP CER 2.2UF 16V X5R 0603"
C2 C3: library part GRM1885C1H100JA01D, "CAP CER 10PF 50V NP0 0603"
C6 C7 C8 C9 C10 C22 C25 C28 C30 C31 C34 C41 C45 C46 C49 C56 C59 C63: library part GRM188R71H104KA93D, "CAP CER 0.1UF 50V X7R 0603"
C11 C12 C13 C14 C15 C16 C17 C18: library part EEEFP1E471AP, "CAP, FP Series, 470 µF, 25 V, Radial Can - SMD, 10 mm"
C19 C20 C21 C26 C40 C44 C55 C60: library part GRM219R6YA475KA73D, "CAP CER 4.7UF 35V X5R 0805"
C24: library part GRM1885C2A820JA01D, "CAP CER 82PF 100V NP0 0603"
C27: library part GRM1885C1H271JA01D, "CAP CER 270PF 50V NP0 0603"
C29: library part T495C686M016ATE250, "CAP TANT 68UF 16V 20% 2312 250mOhm"
C33 C48: library part GRM188R71H223KA01D, "CAP CER 0.022UF 50V X7R 0603"
C36 C38 C39 C42 C51 C53 C54 C57 C62 C64: library part GRM1885C1H222JA01D, "CAP CER 2200PF 50V NP0 0603"
D1 D2: library part MBR140SFT1G, "Rectifier Diode, Single, 40 V, 1 A, SOD-123FL, 2, 550 mV"
FID1 FID2 FID3 FID4: "1mm Fiducial with 2mm soldermask, 3mm keepout"
H1 H2 H3 H4 H5 H6 H7 H8 H9 H10 H11 H12: library part "M3 Hole", "M3 Hole with no copper"
J1: library part 10103594-0001LF, "MICRO USB B, RECEPTACLE, SMT, RA, 5WAY"
J2: library part "Header 5", "Header, 5-Pin"
J3: library part "Header 18", "Header, 18-Pin"
J4: library part "Header 12", "Header, 12-Pin"
J7 J8 J11 J12 J13 J16 J17 J18 J21 J22: library part "M3 Spade Terminal", "M3 Spade Terminal"
J9 J23: "CONN TERM BLOCK 2POS 7.62MM"
J14 J19: "CONN TERM BLOCK 3POS 7.62MM"
L2: library part NR6028T220M, "INDUCTOR 22UH 1.4A 175.5 MOHM"
LED1: library part LTST-C190KGKT, "LED GREEN CLEAR 0603 SMD"
NT1: library part NetTie_2mm
NT2 NT3 NT4 NT5 NT6 NT7 NT8 NT9 NT10 NT11: library part NetTie_0.25mm
Q1 Q2 Q3 Q4 Q5 Q6 Q7 Q8 Q9 Q10 Q11 Q12 Q13 Q14 Q15 Q16 Q17 Q18 Q19 Q20 Q21 Q22 Q23 Q24 Q25 Q26 Q27 Q28: library part NTMFS4935NT1G, "MOSFET N-CH 30V 13A SO8FL"
R1 R2 R3 R4 R26 R29 R44 R47: library part RC0603FR-0722RL, "RES SMD 22 OHM 1% 1/10W 0603"
R5 R25 R30 R43 R48 R55 R57: library part RC0603FR-07120RL, "RES SMD 120 OHM 1% 1/10W 0603"
R6: library part RC0603FR-0710KL, "RES SMD 10K OHM 1% 1/10W 0603"
R7 R58: library part RC0603FR-071KL, "RES SMD 1K OHM 1% 1/10W 0603"
R8 R14: library part RC0603FR-0747KL, "RES SMD 47K OHM 1% 1/10W 0603"
R9 R10 R11 R13 R20 R32 R33 R34 R35 R50: library part RC0603FR-073K3L, "RES SMD 3.3K OHM 1% 1/10W 0603"
R12 R31 R49: library part NCP15XH103F03RC, "THERMISTOR 10K OHM NTC 0402 SMD"
R15: library part RC0603FR-07220KL, "RES SMD 220K OHM 1% 1/10W 0603"
R16 R21 R39: library part RC0603FR-0718KL, "RES SMD 18K OHM 1% 1/10W 0603"
R17 R18 R19 R22 R23 R24 R36 R37 R38 R40 R41 R42 R51 R54: library part RC0603FR-072R2L, "RES SMD 2.2 OHM 1% 1/10W 0603"
R27 R28 R45 R46 R56: library part CSR2512C0R0005F, "RES SMD 0.0005 OHM 1% 3W 2512"
TP1 TP2 TP3 TP4 TP5 TP6 TP7 TP8 TP9 TP10: "SMD test pin"
U2: library part STM32F405RGT6, "ARM Cortex-M4 32-bit MCU+FPU, 210 DMIPS, 1024 kB Flash, 192 kB Internal RAM, 51 I/Os, 64-pin LQFP, -40 to 85 degC, Tray"
U3: library part AZ1117EH-3.3TRG1, "IC REG LDO 3.3V 1A SOT223"
U4 U5: library part DRV8301, "MOTOR DRIVER, 3PH, 56HTSSOP"
U6: library part LM5109BSD/NOPB, "DRIVER, MOSFET, HALF BRIDGE, WSON-8, 1A"
U7: library part AD8418WBRZ, "ANALOG DEVICES Current Sense Amplifier, Bidirectional, 1, 130 µA, NSOIC"
U8: library part LP5907MFX-3.3/NOPB, "IC REG LDO 3.3V 0.25A SOT23-5"
XT1: library part ABM3B-8.000MHZ-10-1-U-T, "Crystal 8MHz ±10ppm 10pF 200 Ohm -10°C ~ 60°C Surface Mount 4-SMD, No Lead (DFN, LCC)"

## Via types
v1: diameter 0.6, hole 0.3, Top Layer to Bottom Layer, tented both sides, 192 vias
v2: diameter 0.7, hole 0.3, Top Layer to Bottom Layer, 154 vias
v3: diameter 0.8, hole 0.3, Top Layer to Bottom Layer, 119 vias
v4: diameter 0.7, hole 0.35, Top Layer to Bottom Layer, 80 vias
v5: diameter 0.75, hole 0.35, Top Layer to Bottom Layer, tented both sides, 37 vias
v6: diameter 0.7, hole 0.3, Top Layer to Bottom Layer, tented both sides, 9 vias
v7: diameter 0.7, hole 0.35, Top Layer to Bottom Layer, tented both sides, 1 vias

## Nets (pads, with @x,y where several pads share a name; then routed paths per layer and width w, separated by ;. In a path a pad name is that pad's centre, name@x,y a point inside that pad or via, vN(x,y) a via of type N, cw(c..) or ccw(c..) an arc to the next point about the centre after c; other vN are vias at no path point)
5V: C29.1 C65.2 J4.2 J4.8 L2.2 R16.1 U3.3 U8.1 U8.3 | length 97.7
  Top Layer w0.5: v1(95.4,45.7) 95.4,48.56 J4.2@95.54,48.7 ; v1(101.2,35.2) 102.2,36.2 v1(102.2,36.8) ; v1(104,40.4) 104.053,40.453 107.053,40.453 v1(107.4,40.8) ; v1(114.5,46.9) 117.7,46.9 v1(119.1,45.5) ; v5(124,43.4) 124,40.553 124.012,40.553 124.453,40.112 124.453,39.488 124.432,39.468 v5(127.5,36.4)
  Bottom Layer w0.5: C65.2@83.85,31.7 85.05,31.7 U8.1@85.25,31.5 85.25,32.256 85.447,32.453 86.947,32.453 ; U8.3@87.15,31.5 87.15,32.25 86.947,32.453 ; v1(95.4,45.7) 95.4,44.431 96.487,43.344 101.056,43.344 v1(104,40.4) ; v1(101.2,35.2) 100.046,35.2 99.44,34.594 92.894,34.594 90.753,32.453 86.947,32.453 ; v1(102.2,36.8) 104.059,36.8 107.4,40.141 v1(107.4,40.8) 107.4,42.16 108.34,43.1 116.725,43.1 v1@118.925,45.3 ; J4.8@110.78,48.7 112.58,46.9 v1(114.5,46.9) ; v1@119.1,45.3 121.6,45.3 122.5,44.4 R16.1@122.5,44.35 123.05,44.35 v5(124,43.4) ; v5(127.5,36.4) 128.9,36.4 ; U3.3@128.9,38.1 128.9,36.4 ; C29.1@132.225,34.5 131.46,34.5 L2.2@128.96,32 128.9,32.06 128.9,36.4
AGND: C1.1 C21.1 C22.2 C23.1 C35.1 C37.1 C38.2 C39.2 C43.1 C50.1 C52.1 C53.2 C54.2 C58.1 C63.2 C64.2 J3.7 NT1.2 R7.1 R13.2 R35.2 R50.2 TP5.1 U2.12 U4.28 U5.28 U7.2 U7.3 U8.2 | length 197.7
  Top Layer w0.152: TP5.1@87,49.1 88.4,47.7 89.8,47.7 90.5,47 v1(91,47) ; R13.2@102.5,33.85 v1(102.5,35) ; v1(103.3,38.5) v7(108.2,38.5)
  Top Layer w0.203: v1(24.7,39.1) 24.7,42.255 29.937,47.492 32.132,47.492 J3.7@33.34,48.7 ; v5(46.6,32.9) 46.8,32.7 C63.2@46.8,31.6 ; v1(66.5,43.336) 68.253,43.336 68.774,42.815 68.774,42.687 U2.12@68.838,42.687 69.47,42.056 69.91,42.056 70.344,42.056 70.505,41.895 70.505,40.905 v1(70.3,40.7) v1@70.145,40.7
  Top Layer w0.25: v6(25.9,40.1) 26.2,40.1 26.8,39.5 26.85,39.55 U5.28@26.85,39.8 ; v7(108.2,38.5) 109.25,39.55 U4.28@109.25,39.8
  Top Layer w0.4: v1(61.2,30.1) 61.2,31.1 v1(63.3,33.2)
  Top Layer w0.5: C54.2@63.5,44.65 65.68,44.65 65.83,44.8 65.9,44.8 C39.2@66.1,45 ; v1(64.9,46.1) 66,45 C39.2@66.1,45 ; C38.2@66.1,46.3 C39.2@66.1,45
  Bottom Layer w0.152: v1(24.7,39.1) 24.7,38.8 25.2,38.3 ; v1(91,47) 91.781,47 93.589,45.192 93.589,44.208 93.321,43.94 93.321,42.65 96.65,39.321 102.498,39.321 103.3,38.519 v1(103.3,38.5) ; 102.5,34.434 v1(102.5,35)
  Bottom Layer w0.203: U7.2@44.775,31.865 45.435,31.865 45.565,31.865 v5(46.6,32.9) ; v1(64.9,46.1) 64.9,44.936 v1(66.5,43.336) ; C22.2@69.1,40.3 69.5,40.7 ; 69.6,40.7 v1(70.3,40.7)
  Bottom Layer w0.3: 75.5,29.665 75.612,29.553
  Bottom Layer w0.4: v1(63.3,33.2) 63.75,33.65 R7.1@63.75,34.2 R7.1@63.753,34.2 ; R50.2@65.15,34.2 R7.1@63.753,34.2 ; C22.2@69.1,40.3 69.1,39 67.7,39 66.35,39 66.3,38.95 64.95,38.95 64.9,39 63.55,39 62.772,38.222 62.772,36.122 63.753,35.141 R7.1@63.753,34.2
  Bottom Layer w0.5: R35.2@20.025,33.925 20.825,33.925 25.2,38.3 25.5,38.6 ; v6@26.006,40.1 v6(25.9,40.1) 25.9,39 25.5,38.6 ; C52.1@26.15,38.2 25.9,38.2 25.5,38.6 ; C50.1@27.4,41.5 27.3,41.5 25.906,40.106 39.553,40.106 41.759,37.9 41.759,35.541 45.435,31.865 47.828,29.472 50.592,29.472 51.441,30.321 51.441,30.574 53.526,32.659 56.535,32.659 59.438,29.756 62.429,29.756 62.554,29.631 63.534,29.631 63.836,29.329 74.764,29.329 74.988,29.553 75.612,29.553 77.799,29.553 78.035,29.317 83.317,29.317 NT1.2@83.5,29.5 ; NT1.2@84.453,29.5 85.5,30.547 86.2,30.547 ; U8.2@86.2,31.5 86.2,30.547 ; C21.1@89.344,30.85 C21.1@89.1,30.85 ; C35.1@109.1,41.5 109.1,39.812 108.2,38.912 v7(108.2,38.5) 108.146,38.5 104.08,34.434 102.5,34.434 100.275,34.434 99.732,33.891 93.185,33.891 90.144,30.85 C21.1@89.1,30.85 ; 86.2,30.547 88.797,30.547 C21.1@89.1,30.85
AUX_H_1: U2.30 U6.2 | length 17.1
  Top Layer w0.203: U6.2@64.605,26.4 63.639,26.4 62.217,27.822 62.217,30.829 63.143,31.755 69.708,31.755 U2.30@72.02,34.067
AUX_I_1: C64.1 R57.2 TP10.1 U2.21 | length 53.8
  Top Layer w0.152: v1(53.2,35.8) 53.7,36.3 v1@57.581,36.3 ; v1(57.6,36.3) v1@57.581,36.3 ; U2.21@68.838,37.313 68.838,37.213 68.813,37.187 68.813,37.288 67.688,36.162 65.462,36.162 v1(64.8,35.5) 64.744,35.556 64.427,35.556 64.352,35.632 63.088,35.632 62.54,36.179 61.898,36.179 61.729,36.349 60.37,36.349 60.04,36.679 57.96,36.679 v1@57.581,36.3 ; v1(78.1,47.2) 78.535,47.635 81.035,47.635 TP10.1@82.5,49.1
  Bottom Layer w0.152: R57.2@52,36.325 52.675,36.325 v1(53.2,35.8) ; v1(57.6,36.3) 58,36.7 58,39.419 59.86,41.279 61.406,41.279 62.599,42.472 62.599,44.618 65.181,47.2 v1(78.1,47.2) ; v1(64.8,35.5) C64.1@64.8,37.35
AUX_L_1: U2.29 U6.3 | length 18.1
  Top Layer w0.203: U6.3@64.605,25.6 64.325,25.88 63.585,25.88 61.811,27.654 61.811,30.997 62.974,32.161 69.343,32.161 U2.29@71.523,34.341
AUX_TEMP_1: C58.2 R49.1 R50.1 U2.24 | length 27.1
  Top Layer w0.203: v1(68,34.6) 68.705,35.305 68.951,35.305 U2.24@69.899,36.252 ; v1(73.3,32.3) 74.929,32.3 76.414,30.815 76.414,30.15 78.025,28.54 R49.1@78.025,21.7
  Bottom Layer w0.203: R50.1@66.65,33.8 67.45,34.6 v1(68,34.6) ; C58.2@67.8,37.6 67.8,34.8 v1(68,34.6) ; v1(73.3,32.3) 73.1,32.3 71.394,34.006 68.594,34.006 v1(68,34.6)
AVCC: C21.2 C22.1 C63.1 J3.6 R12.2 R31.2 R49.2 TP4.1 U2.13 U4.24 U5.24 U7.6 U7.7 U8.4 U8.5 | length 239.5
  Top Layer w0.152: TP4.1@88.5,49.1 90.5,49.1 91.8,47.8 v1(91.8,46) ; v1(102.3,38.7) 102.3,38.681 103.681,37.3 108,37.3 108.7,36.6
  Top Layer w0.203: v1(23.5,35.2) 24.055,35.755 24.055,42.184 25.245,43.375 30.571,48.7 J3.6@30.8,48.7 ; R31.2@25.5,21.7 25.6,21.8 v6(25.6,28) ; v5(48.4,32.9) 48.4,31.8 48.2,31.6 57.7,31.6 59.2,30.1 ; U2.13@68.485,42.333 68.485,42.269 69.303,41.451 v1@69.851,41.451 ; v1(75.3,28.8) 75.3,27.535 76.675,26.16 R49.2@76.675,21.7 ; v5(104,31.9) 108.7,36.6 109.895,37.795 111.395,37.795 v1(112,38.4) ; v6(104.1,28) 104.125,27.975 R12.2@104.125,22
  Top Layer w0.25: U5.24@28.85,39.8 28.872,39.8 28.872,39.052 29.5,38.424 v5(29.5,37.4) ; U4.24@111.25,39.8 111.25,39.009 111.859,38.4 v1(112,38.4)
  Top Layer w0.4: v1(59.2,29) 59.2,30.1 59.2,30.914 61.3,33.014 v1(61.3,33.2) ; v1(61.8,39.2) 66.612,39.2 67.578,40.166 68.566,40.166 v1@69.851,41.451
  Bottom Layer w0.152: v1(91.8,46) 92.219,46 93.079,45.14 93.079,44.56 92.966,44.447 92.966,42.503 96.769,38.7 v1(102.3,38.7)
  Bottom Layer w0.203: v1(23.5,35.2) 23.82,34.88 23.82,34.875 ; v6(25.6,28) 23.82,29.78 23.82,34.875 ; v5(29.5,37.4) 27.331,37.4 25.335,35.404 24.35,35.404 23.82,34.875 ; U7.7@50.225,31.865 49.435,31.865 v5(48.4,32.9) 48.635,33.135 U7.6@50.225,33.135 ; C22.1@67.7,40.3 67.703,40.297 68.906,41.5 ; 69.006,41.5 69.055,41.451 v1(69.9,41.451) ; v5(104,31.9) 104,28.1 v6(104.1,28)
  Bottom Layer w0.4: v1(61.3,33.2) 61.3,33.496 61.197,33.599 61.197,34.801 61.503,35.107 61.503,38.903 v1(61.8,39.2)
  Bottom Layer w0.5: v5(29.5,37.4) 31.503,39.403 39.262,39.403 41.056,37.609 41.056,30.844 43.228,28.672 50.786,28.672 52.144,30.03 52.144,30.283 53.817,31.956 56.244,31.956 v1(59.2,29) 59.253,29.053 62.138,29.053 62.263,28.928 63.243,28.928 63.557,28.614 75.114,28.614 v1(75.3,28.8) 75.486,28.614 84.964,28.614 U8.5@85.25,28.9 U8.4@87.15,28.9 88.85,28.9 C21.2@89.1,29.15 89.438,29.15 93.476,33.188 100.023,33.188 100.566,33.731 104.372,33.731 108.238,37.597 110.915,37.597 111.718,38.4 v1(112,38.4)
BOOT0_1: R8.2 U2.60 | length 14.9
  Top Layer w0.152: U2.60@76.687,45.162 77.6,46.075 v1(77.6,46.5)
  Bottom Layer w0.152: R8.2@67.75,43.2 67.224,43.726 67.224,45.346 68.378,46.5 v1(77.6,46.5)
CAN_D_1: U1.1 U2.62 | length 61.1
  Top Layer w0.152: v1(29.7,45) 29.7,45.003 31.453,46.755 38.308,46.755 38.542,46.99 51.334,46.99 51.569,46.755 56.042,46.755 56.887,45.91 58.963,45.91 59.418,45.455 61.627,45.455 64.243,48.07 75.446,48.07 76.665,46.851 76.665,46.555 U2.62@75.98,45.869
  Bottom Layer w0.152: U1.1@20.225,44.405 20.315,44.315 25.801,44.315 26.487,45 v1(29.7,45)
CAN_H_1: J3.3 R5.2 U1.7 | length 13.2
  Bottom Layer w0.203: U1.7@14.775,43.135 16.746,43.135 19.111,45.5 R5.2@23.65,45.5 23.65,48.23 J3.3@23.18,48.7
CAN_L_1: J3.4 R5.1 U1.6 | length 15.7
  Bottom Layer w0.203: U1.6@14.775,41.865 16.405,41.865 19.55,45.01 22.826,45.01 23.14,44.695 24.545,44.695 R5.1@25.35,45.5 25.35,48.33 J3.4@25.72,48.7